# EAGLE board strip_charlie_12_save (EAGLE 5.11)
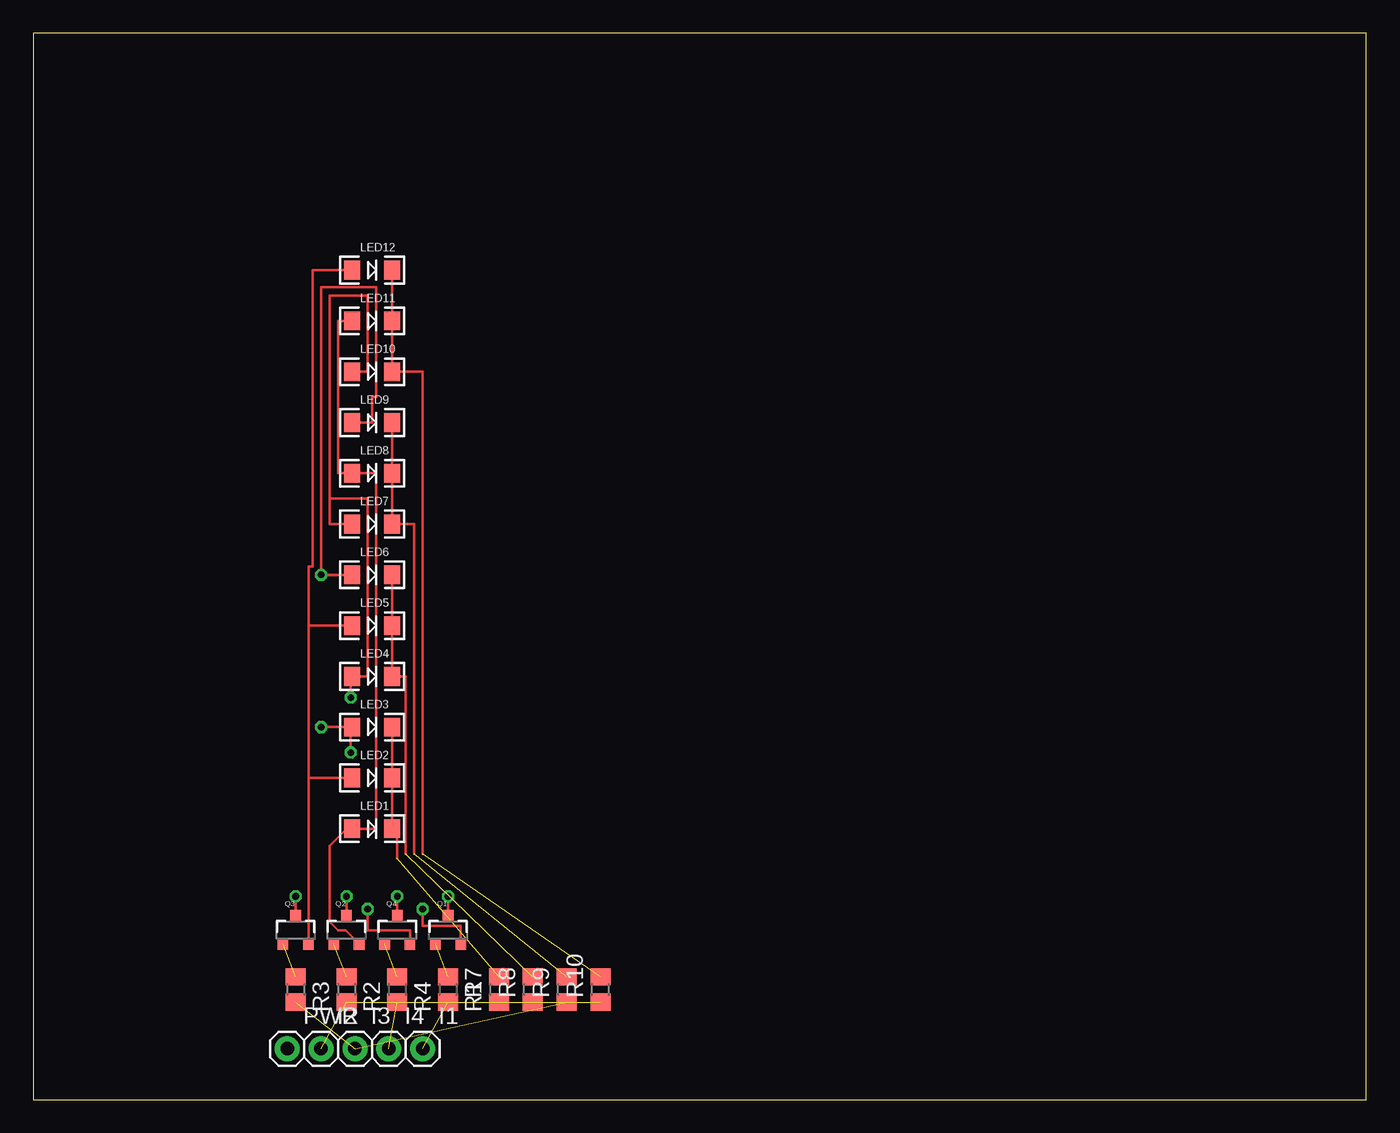
[diagram p0: board, top side]
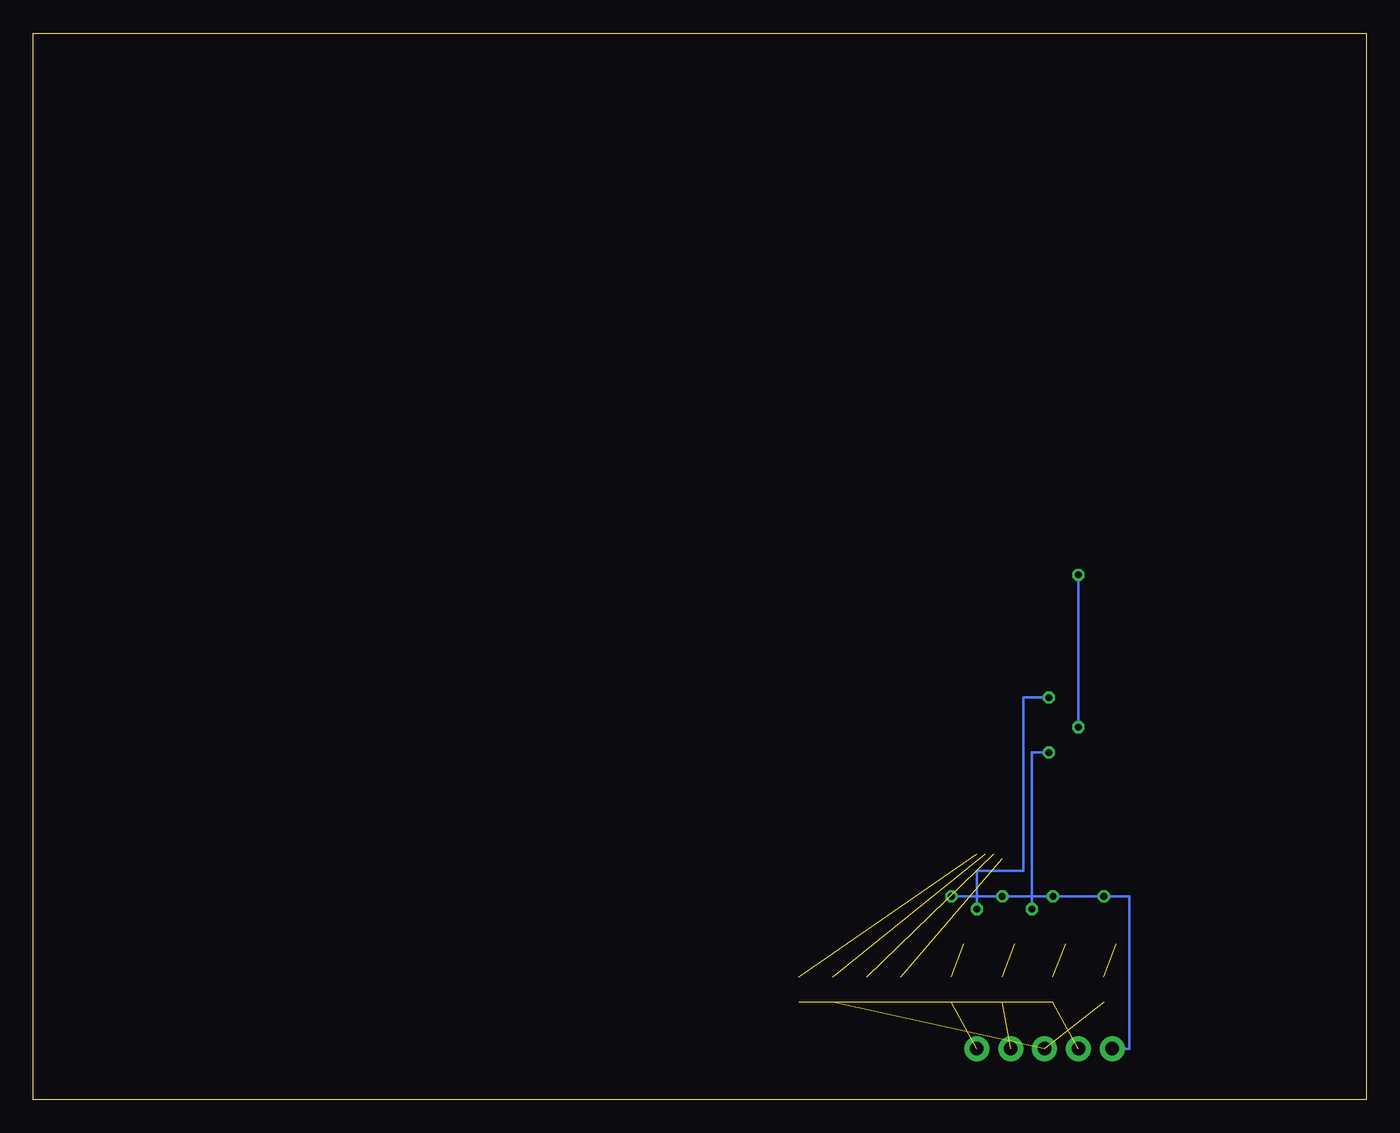
[diagram p1: board, bottom side, seen from below]

Size 100 x 80 mm. Coordinates in mm from the lower left corner, seen from the top.
Outline: 0,0 100,0 100,80 0,80 0,0
Copper layers (1*16): Top 0.035mm / dielectric 1.5mm / Bottom 0.035mm
Design rules "default *": minimum track width 8mil, minimum drill 19mil, track to track 8mil, track to pad 8mil, pad to pad 8mil, via to via 8mil, smd to smd 8mil, copper to edge 40mil, drill to drill 8mil, minimum pad ring 10mil, minimum via ring 8mil, stop-mask expansion 4mil, vias tented up to drill 0mil, thermal gap 10mil

## Footprints (pad centres in the part's own frame; a part is rotated, then mirrored left to right if it is on the bottom)
1X01 = drill 1.016 pad 1.88 round: 1 0,0
LED-1206 = smd 1.2 x 1.4: A -1.5,0; C 1.5,0
SOT23-3 = smd 0.8 x 0.9: 1 -0.95,-1; 2 0.95,-1; 3 0,1.1
R0805 = smd 1.3 x 1.5: 1 -0.95,0; 2 0.95,0

## Placement (x,y rotation side)
I1  M01PTH  [1X01]  29.21,3.81 0 top
I2  M01PTH  [1X01]  21.59,3.81 0 top
I3  M01PTH  [1X01]  24.13,3.81 0 top
I4  M01PTH  [1X01]  26.67,3.81 0 top
LED1  [LED-1206]  25.4,20.32 0 top
LED2  [LED-1206]  25.4,24.13 0 top
LED3  [LED-1206]  25.4,27.94 0 top
LED4  [LED-1206]  25.4,31.75 0 top
LED5  [LED-1206]  25.4,35.56 0 top
LED6  [LED-1206]  25.4,39.37 0 top
LED7  [LED-1206]  25.4,43.18 0 top
LED8  [LED-1206]  25.4,46.99 0 top
LED9  [LED-1206]  25.4,50.8 0 top
LED10  [LED-1206]  25.4,54.61 0 top
LED11  [LED-1206]  25.4,58.42 0 top
LED12  [LED-1206]  25.4,62.23 0 top
PWR  M01PTH  [1X01]  19.05,3.81 0 top
Q1  [SOT23-3]  31.11,12.7 0 top
Q2  [SOT23-3]  23.5,12.7 0 top
Q3  [SOT23-3]  19.68,12.7 0 top
Q4  [SOT23-3]  27.3,12.7 0 top
R1  [R0805]  31.11,8.26 270 top
R2  [R0805]  23.5,8.26 270 top
R3  [R0805]  19.68,8.26 270 top
R4  [R0805]  27.3,8.26 270 top
R7  [R0805]  34.92,8.26 90 top
R8  [R0805]  37.47,8.26 90 top
R9  [R0805]  40.01,8.26 90 top
R10  [R0805]  42.55,8.26 90 top
U$1  FHI_LOGO  [FHI_LOGO]  -20.32,34.29 0 top  (outside the outline)

## Library data of the parts
I1-I4 PWR Q1-Q4 = SparkFun
LED1-LED12 R1-R4 R7-R10 U$1 = CyberRailGuru

## Nets
N$1: LED4.A LED7.A LED10.A Q1.2
N$4: LED4.C LED5.C LED6.C R8.2
N$5: LED7.C LED8.C LED9.C R9.2
N$6: LED10.C LED11.C LED12.C R10.2
N$15: Q1.1 R1.1
N$16: Q2.1 R2.1
N$17: Q3.1 R3.1
N$18: Q4.1 R4.1
OUT1: I1.1 R1.2 R7.1
OUT1_4: LED1.C LED2.C LED3.C R7.2
OUT2: I2.1 R2.2 R8.1
OUT2_2: LED1.A LED8.A LED11.A Q2.2
OUT3: I3.1 R3.2 R9.1
OUT3_2: LED2.A LED5.A LED12.A Q3.2
OUT4: I4.1 R4.2 R10.1
OUT4_2: LED3.A LED6.A LED9.A Q4.2
VCC: PWR.1 Q1.3 Q2.3 Q3.3 Q4.3

## Tracks (layer width: path | path; a pad name or v marks a point on that pad's centre or on a via)
N$1  (via drill 0.5)
  Top 0.203: LED10.A 25.08,54.61 25.08,60.33 22.23,60.33 22.23,45.09 | LED7.A 22.23,43.18 22.23,45.09 | 22.23,45.09 25.08,45.09 25.08,31.75 LED4.A 23.81,31.75 v23.81,30.16 | v29.21,14.29 29.21,13.02 32.06,13.02 Q1.2
  Bottom 0.203: v23.81,30.16 25.72,30.16 25.72,17.14 29.21,17.14 v29.21,14.29
N$4  (1 unrouted)
  Top 0.203: LED6.C LED5.C LED4.C 27.94,31.75 27.94,18.41
N$5  (1 unrouted)
  Top 0.203: LED9.C LED8.C LED7.C 28.57,43.18 28.57,18.41
N$6  (1 unrouted)
  Top 0.203: LED12.C LED11.C LED10.C 29.21,54.61 29.21,18.41
N$15  (1 unrouted)
N$16  (1 unrouted)
N$17  (1 unrouted)
N$18  (1 unrouted)
OUT1  (2 unrouted)
OUT1_4  (1 unrouted)
  Top 0.203: LED3.C LED2.C LED1.C 27.3,20 27.3,18.1
OUT2  (2 unrouted)
OUT2_2
  Top 0.203: LED11.A 22.86,58.42 22.86,46.99 LED8.A 25.72,46.99 25.72,20.32 LED1.A 23.5,20.32 22.23,19.05 22.23,13.34 22.86,12.7 23.45,12.7 Q2.2
OUT3  (2 unrouted)
OUT3_2
  Top 0.203: LED12.A 20.95,62.23 20.95,40.01 20.64,40.01 20.64,35.56 | 20.64,24.13 LED2.A | 20.64,35.56 LED5.A | 20.64,24.13 20.64,35.56 | 20.64,24.13 Q3.2
OUT4  (2 unrouted)
OUT4_2  (via drill 0.5)
  Top 0.203: LED9.A 25.4,50.8 25.4,52.7 25.72,52.7 25.72,60.96 21.59,60.96 v21.59,39.37 LED6.A | v21.59,27.94 LED3.A 23.81,27.94 v23.81,26.04 | v25.08,14.29 25.08,12.7 28.25,12.7 Q4.2
  Bottom 0.203: v21.59,27.94 v21.59,39.37 | v23.81,26.04 25.08,26.04 v25.08,14.29
VCC  (via drill 0.5)
  Top 0.203: v31.11,15.24 Q1.3 | v27.3,15.24 Q4.3 | v19.68,15.24 Q3.3 | v23.5,15.24 Q2.3
  Bottom 0.203: v31.11,15.24 v27.3,15.24 v23.5,15.24 v19.68,15.24 17.78,15.24 17.78,3.81 PWR.1